# Altium PCB Lab2_PCB.PcbDoc
Units mil, origin at the board's own origin, x right, y up, seen from the top; angles counter-clockwise.
Board outline 1645 x 695 mil, 2 copper layers (Top Layer, Bottom Layer); 15 components, 10 nets, 36 pads, 13 vias.
Unrouted connection lines stored in the file: 1.
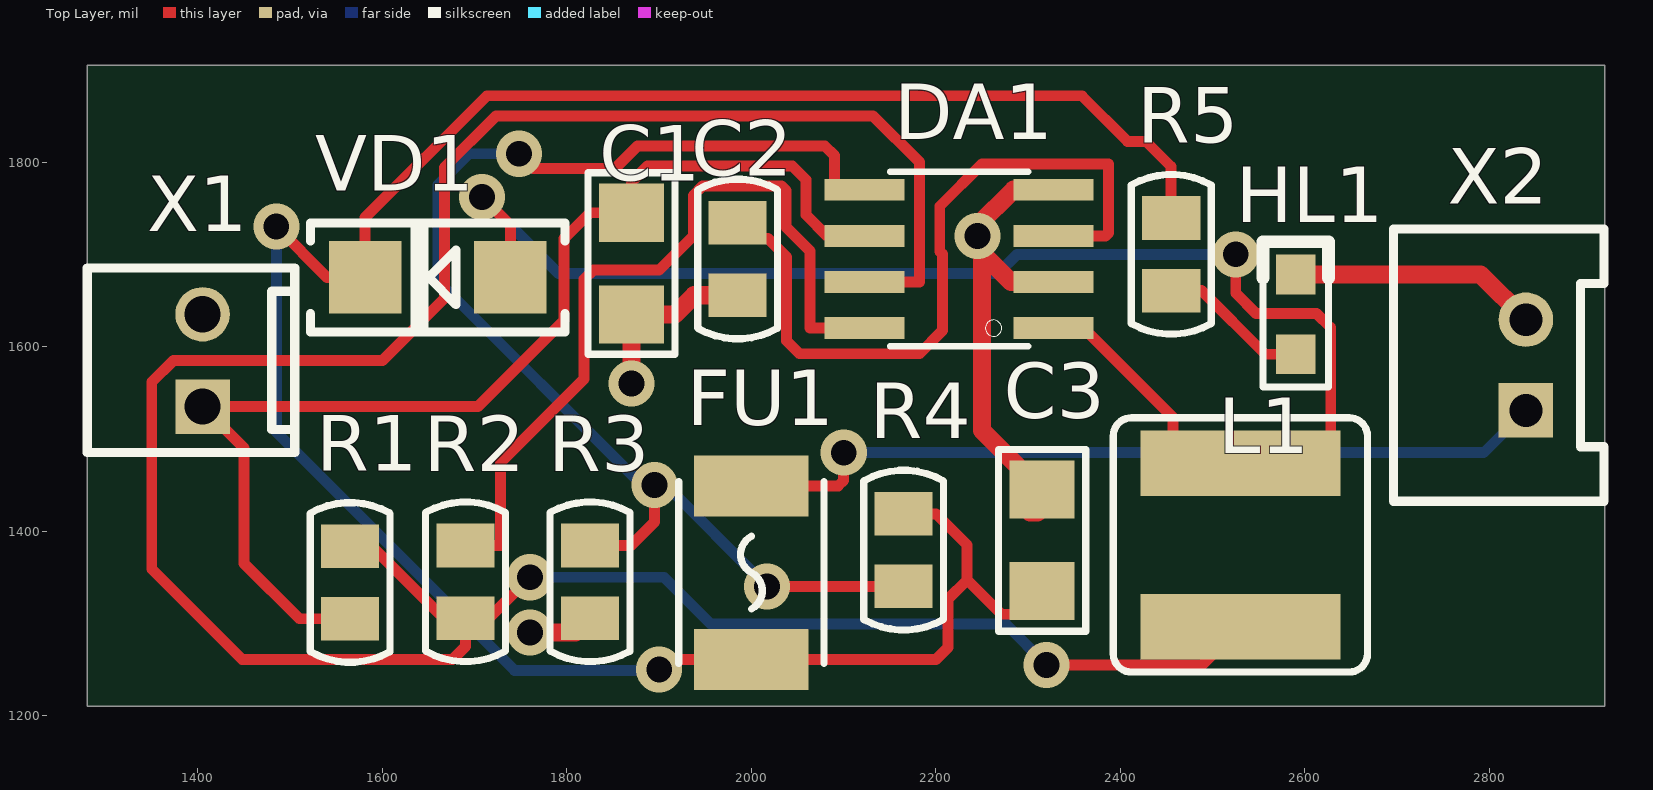
[diagram p0: Top Layer view]
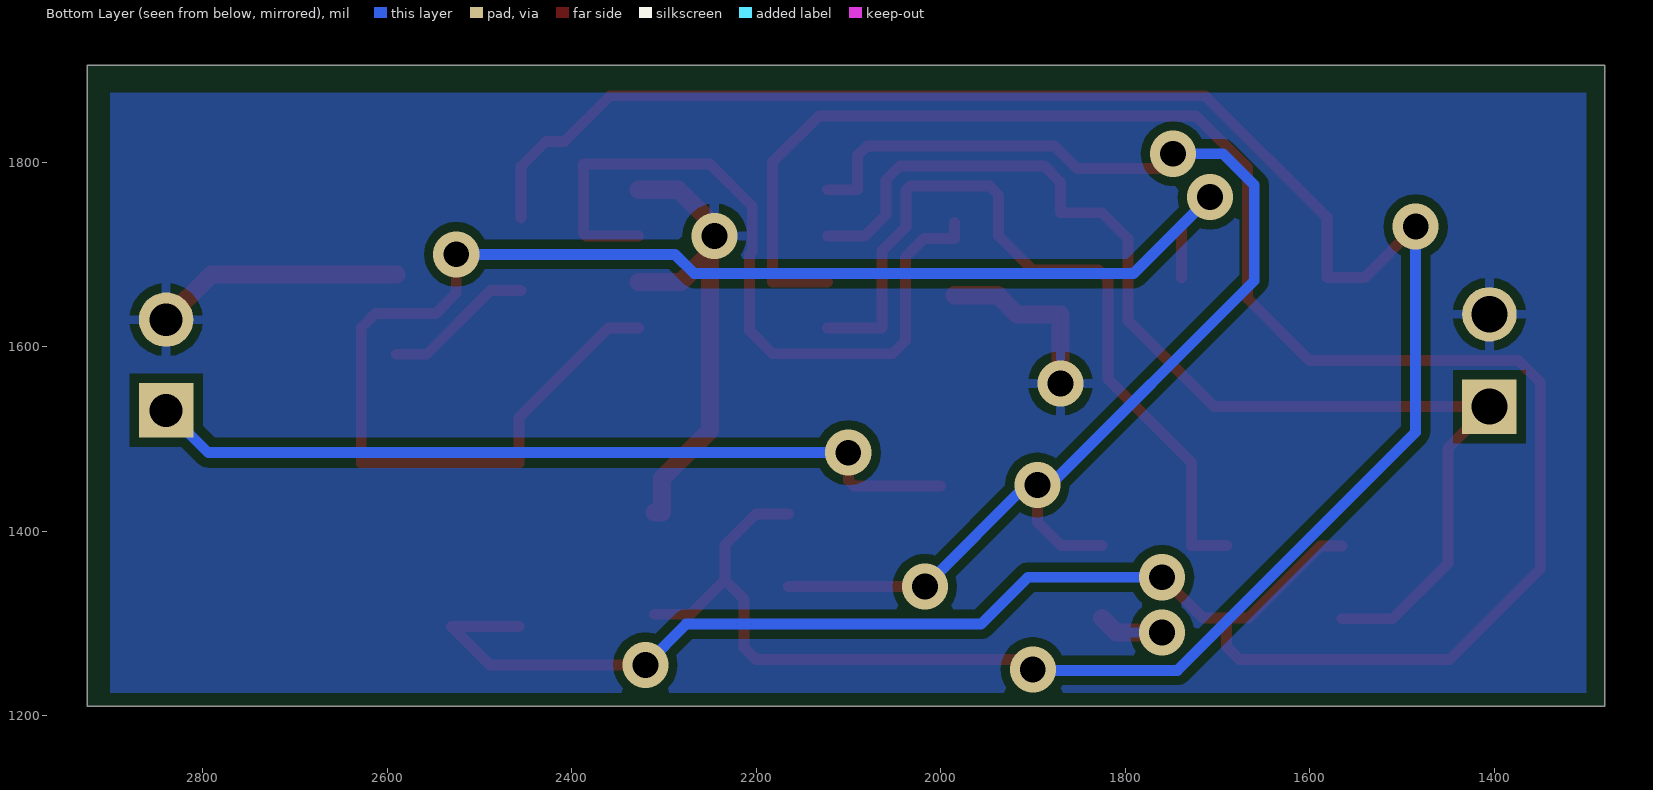
[diagram p1: Bottom Layer view, seen from below]
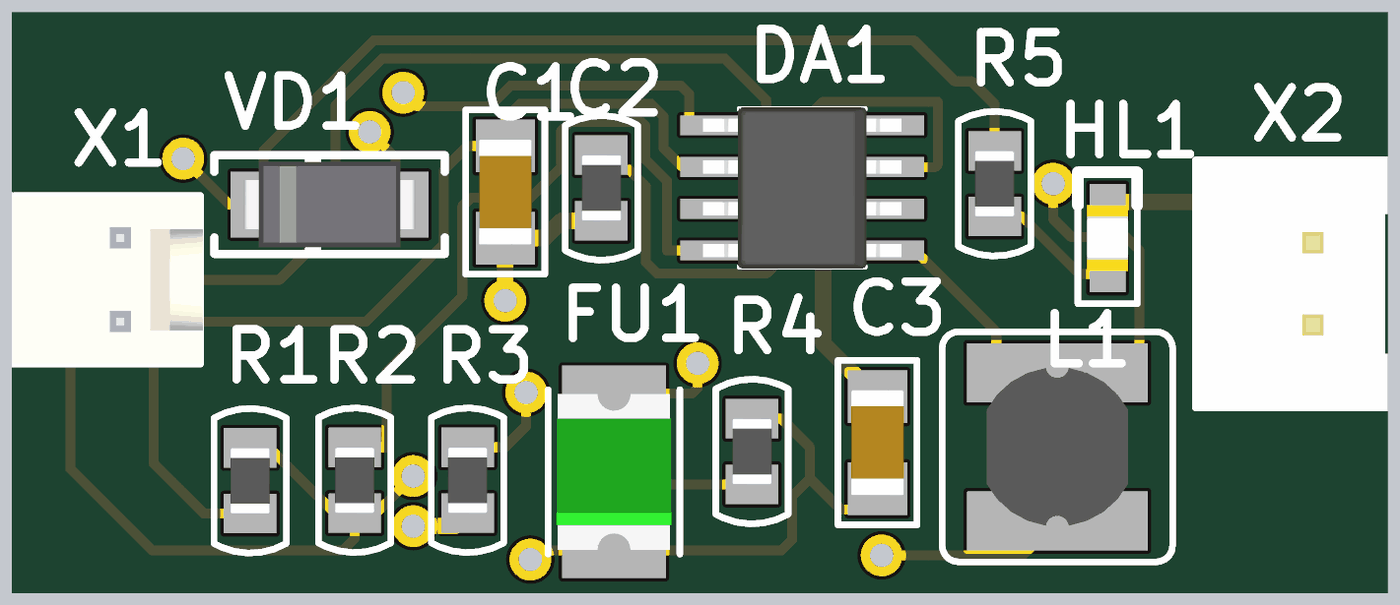
[diagram p2: 3D render of the assembled board from above, using the file's embedded part models]

## Layer stack, top to bottom
Top Solder: solder mask 0.4, Solder Resist, Dk 3.5
Top Layer: signal copper 1.4
Dielectric 1: dielectric 12.6, FR-4, Dk 4.8
Bottom Layer: signal copper 1.4
Bottom Solder: solder mask 0.4, Solder Resist, Dk 3.5

## Board outline
1280,1210 2925,1210 2925,1905 1280,1905

## Design rules (kind name [scope] priority, off if disabled: settings)
Clearance [All] p1: gap=10 ignorepadtopadclearanceinfootprint=FALSE except(0: Arc-Hole Track-Hole SMDPad-Hole THPad-Hole Via-Hole Fill-Hole Poly-Hole Region-Hole Text-Hole)
PolygonConnect [All] p1: connectstyle=Relief reliefconductorwidth=10 reliefentries=4 polygonreliefangle="90 Angle" airgapwidth=10
RoutingVias [All] p1: holewidth=28 width=50 viastyle="Through Hole" minholewidth=28 minwidth=50 maxholewidth=28 maxwidth=50
SolderMaskExpansion [All] p1: expansion=4
Width GND_0.5 [InNet('GND')] p1: maxlimit=19.68 minlimit=19.68 preferedwidth=19.68
Width PWR_0.3 [All] p2: maxlimit=11.81 minlimit=11.81 preferedwidth=11.81
Width Width_1 [All] p3: maxlimit=5.91 minlimit=5.91 preferedwidth=5.91
30 further rules are at their usual default settings.

## Components (designator, comment, footprint, x,y, rotation, side; value= is the part's Value field where it differs from the comment)
C1 "Capacitor-E" C1206 1870,1690 r270 top
C2 "Capacitor" R0805 1985,1695 r90 top
C3 "Capacitor-E" C1206 2315,1390 r90 top
DA1 "MC34063A" PCBComponent_1 2225,1695 r90 top
FU1 "Fuse" F1812 2000,1355 r270 top value=1.5A
HL1 "LED_3V" LD0805 2590,1635 r90 top
L1 "Coil" МДГ-2 2530,1385 r90 top value=40мк
R1 "Resistor_1,0W" R0805 1565,1344.37 r90 top value=0.125
R2 "Resistor_0,25W" R0805 1690,1345 r90 top
R3 "Resistor_0,25W" R0805 1825,1345 r90 top value=1.5к
R4 "Resistor_0,25W" R0805 2165,1379.37 r90 top value=13к
R5 "Resistor_10,0W" R0805 2455,1700 r90 top
VD1 "Schottky" DO-214AC 1660,1675 r180 top
X1 "Vin" WF-2 1405,1585 r270 top
X2 "Vout" CWF-2 2810,1580 r90 top

## Footprints (in the part's own frame and the unit in brackets; to place one, negate y for a bottom-side part, rotate by r counter-clockwise, add the part's x,y. Pads: shape width x height; smd on the part's side, far side on the other; paste and mask are expansions set on the pad)
C1206 [mm] "3216M"
  rect 1.6x1.8 smd: 1(-1.4,0) 2(1.4,0)
  silkscreen extent -2.5,-1.2 2.5,1.2, body extent -1.6,-0.8 1.6,0.8, height 1.01
CWF-2 [mm]
  rect 1.5x1.5 hole 0.9: 1(-1.25,-0.75)
  round 1.5 hole 0.9: 2(1.25,-0.75)
  silkscreen extent -3.75,-2.9 3.75,2.9, body extent -3.75,-2.85 3.75,2.9, height 7.2
DO-214AC [mm] "(SMA) Low profile package"
  rect 2x2 smd: 1(-2,0) 2(2,0)
  silkscreen extent -3.5,-1.5 3.5,1.5, body extent -2.6,-1.3 2.6,1.3, height 2.4
F1812 [mm]
  rect 1.68x3.15 smd: 1(-2.39,0) 2(2.39,0)
  silkscreen extent -2.5,-2 2.5,2, body extent -2.36,-1.74 2.37,1.74, height 1.04
LD0805 [mm]
  rect 1.1x1.1 smd: 1(-1.1,0) 2(1.1,0)
  silkscreen extent -2,-0.9 2,0.9, body extent -1,-0.62 1,0.63, height 0.73
PCBComponent_1 [mm]
  rect 0.6x2.2 smd: 1(-1.905,-2.6) 2(-0.635,-2.6) 3(0.635,-2.6) 4(1.905,-2.6) 5(1.905,2.6) 6(0.635,2.6) 7(-0.635,2.6) 8(-1.905,2.6)
  silkscreen extent -2.4,-1.9 2.4,1.9, body extent -2.45,-3.01 2.45,3.01, height 1.63
R0805 [mm] "2012M"
  rect 1.2x1.6 smd: 1(-1,0) 2(1,0)
  silkscreen extent -2.2,-1.1 2.2,1.1, body extent -1,-0.6 1,0.6, height 0.5
WF-2 [mm]
  rect 1.5x1.5 hole 1: 1(1.27,0)
  round 1.5 hole 1: 2(-1.27,0)
  silkscreen extent -2.54,-3.18 2.54,2.54, body extent -2.54,-3.18 2.54,2.62, height 11.76
МДГ-2 [mm]
  rect 1.8x5.5 smd: 1(-2.25,0) 2(2.25,0)
  Top Layer pour cut-out: -1.35,2.75 1.35,2.75 1.35,-2.75 -1.35,-2.75
  silkscreen extent -3.5,-3.5 3.5,3.5, body extent -2.4,-2.15 2.4,2.15, height 3.5

## Part data
HL1: library part Led-1, Published=03.12.2013, Publisher="Andrew Danich", Type="Индикатор единичный", Произв. номер=SMLE13EC8TT86, Прямое напряжение=3В, Прямой ток=0.5А, Цвет=Синий
L1: library part КИВ18-100, DC Resistance=1.2ohm, Manufacturer="ОАО \"МСТАТОР\"", Rated Current=185mA, Tolerance=±10%, Working Temperature Max=+85°С, Working Temperature Min=-60°С, Application Category=5, ID=1, Part Number=КИВ18-100, Published=20.05.2010, Publisher="Andrew Danich", Q=20, Specification="КВШУ.670114.001 ТУ", Type=Дроссель
VD1: "BYV10-40", Type=Диод, Максимальное обратное напряжение=40В, Прямой ток="1 А"
C1 C3: Published=20.08.2010, Publisher="Олег Литвинов", Type=Конденсатор, Ёмкость=100мк, Напряжение=50В
C2: Published=18.05.2010, Publisher="Andrew Danich", Type=Конденсатор, Ёмкость=239, Напряжение=50В
FU1: Type="Вставка плавкая"
R1 R3 R4: Type=Резистор
R2: Type=Резистор, Сопротивление=180
R5: Type=Резистор, Сопротивление=30
X1: Create=DeathSpeaker, GND=GND, In=D+, Out=D-, U=+(5-9)В
X2: Create=DeathSpeaker, GND=GND, U=+12В

## Via types
v1: diameter 50, hole 28, Top Layer to Bottom Layer, 13 vias

## Nets (pads, with @x,y where several pads share a name; then routed paths per layer and width w, separated by ;. In a path a pad name is that pad's centre, name@x,y a point inside that pad or via, vN(x,y) a via of type N, cw(c..) or ccw(c..) an arc to the next point about the centre after c; other vN are vias at no path point)
GND: C1.2 C2.1 C3.2 DA1.2 DA1.4 HL1.2 R3.1 X1.2 X2.2 | length 1071.2
  Top Layer w19.68: v1(1760,1290) 1809.37,1290 R3.1 ; v1(1870,1560) C1.2 1917,1634.88 1937.75,1655.63 C2.1 ; C3.2@2310,1420.12 2302,1420.12 2302,1457 2250,1509 v1@2250,1701.5 ; DA1.2 2281.5,1670 v1@2250,1701.5 ; DA1.4 2284,1770 2245,1731 v1(2245,1720) 2245,1706.5 v1@2250,1701.5 ; HL1.2 2790.43,1678.31 X2.2
NetC1_1: C1.1 DA1.6 R1.1 X1.1 | length 1279
  Top Layer w11.81: R1.1 1510,1305 1450,1365 1450,1490 X1.1 1703.45,1535 1796.85,1628.4 1796.85,1716.97 1825,1745.12 C1.1 1870,1778.21 1887.5,1795.71 2044.29,1795.71 2059.1,1780.9 2059.1,1742.9 2082,1720 DA1.6
NetC2_2: C2.2 DA1.3 | length 828.3
  Top Layer w11.81: C2.2 1985,1717 2018,1717 2038,1697 2038,1606.28 2052,1592.28 2182,1592.28 2207,1617.28 2207,1700.15 2204.09,1703.06 2204.09,1752.09 2250,1798 2387,1798 2387,1723 2384,1720 DA1.3
NetC3_1: C3.1 FU1.2 R4.2 R5.2 VD1.2 | length 2577.5
  Top Layer w11.81: v1(1485,1730) 1540,1675 VD1.2 1581.26,1739.9 1713.25,1871.89 2358.11,1871.89 2407.5,1822.5 2427.5,1822.5 2455,1795 R5.2 ; v1@1889,1239 v1(1900,1250) 1910.91,1260.91 FU1.2 2200,1260.91 2213,1273.91 2213,1326.27 2233.87,1347.13 ; R4.2 2200,1418.74 2233.87,1384.87 2233.87,1347.13 ; C3.1@2310,1309.88 2271.12,1309.88 2233.87,1347.13
  Bottom Layer w11.81: v1(1485,1730) 1485,1507.15 1743.06,1249.09 1899.09,1249.09 v1(1900,1250)
NetDA1_1: DA1.1 L1.2 VD1.1 | length 1657.4
  Top Layer w11.81: v1(1708,1762) 1738.74,1731.26 VD1.1 ; DA1.1 2360,1620 2457,1523 2457,1473.58 L1.2 2628,1473.58 2628,1620.5 2612.5,1636 2547,1636 2525,1658 v1(2525,1700)
  Bottom Layer w11.81: v1(1708,1762) 1790.91,1679.09 2266.94,1679.09 2287.85,1700 v1(2525,1700)
NetDA1_5: DA1.5 R3.2 R4.1 | length 1403.8
  Top Layer w11.81: v1(1748,1809) 1764,1793 1852,1793 1876.52,1817.52 2079.48,1817.52 2090,1807 2090,1770 DA1.5 ; R3.2 1869.37,1384.37 1895,1410 v1(1895,1450) ; v1(2017,1340) R4.1
  Bottom Layer w11.81: v1(1748,1809) 1694,1809 1660,1775 1660,1671.41 1881.41,1450 v1(1895,1450) 1901,1450 1904,1453 v1(2017,1340)
NetDA1_7: DA1.7 L1.1 R1.2 R2.1 | length 3009.6
  Top Layer w11.81: R1.2 1588,1383.74 1666.11,1305.63 R2.1 ; v1(1760,1350) 1715.63,1305.63 R2.1 ; DA1.7 2182,1670 2182,1800 2131.92,1850.08 1723.03,1850.08 1667.09,1794.14 1667.09,1652.09 1600,1585 1373.45,1585 1350,1561.55 1350,1359 1448,1261 1676,1261 1690,1275 R2.1 ; v1(2320,1255) 2488.58,1255 L1.1 L1.1@2457,1296.42
  Bottom Layer w11.81: v1(1760,1350) 1905.15,1350 1956.06,1299.09 2275.91,1299.09 v1(2320,1255)
NetDA1_8: DA1.8 R2.2 | length 871.4
  Top Layer w11.81: R2.2 1728,1384.37 1728,1474.34 1818.66,1565 1818.66,1672.96 1828.7,1683 1900,1683 1937,1720 1937,1763.98 1946.92,1773.9 2032.4,1773.9 2037.29,1769.01 2037.29,1729.71 2063.43,1703.57 2063.43,1620 DA1.8
NetFU1_1: FU1.1 X2.1 | length 890.9
  Top Layer w11.81: FU1.1 2094.09,1449.09 2100,1455 v1(2100,1485)
  Bottom Layer w11.81: v1(2100,1485) 2793.74,1485 X2.1
NetHL1_1: HL1.1 R5.1 | length 163.6
  Top Layer w11.81: R5.1 2488,1660.63 2556.94,1591.69 HL1.1

## Polygon pours and split planes (outlines as drawn)
GND on Bottom Layer "Bottom Layer-GND" (solid, pour order 8): 1300,1875 2900,1875 2900,1225 1300,1225

## Silkscreen, mask and mechanical layers (free items; w line width, h text height)
Mechanical 19:
  the board outline again, w10

## Text inside footprints (layer, text, board x,y; h text height)
L1: Mechanical 13 "Check!" at 2545.75,1243.27 h60 r90